# EAGLE board board layout (EAGLE 9.5.2)
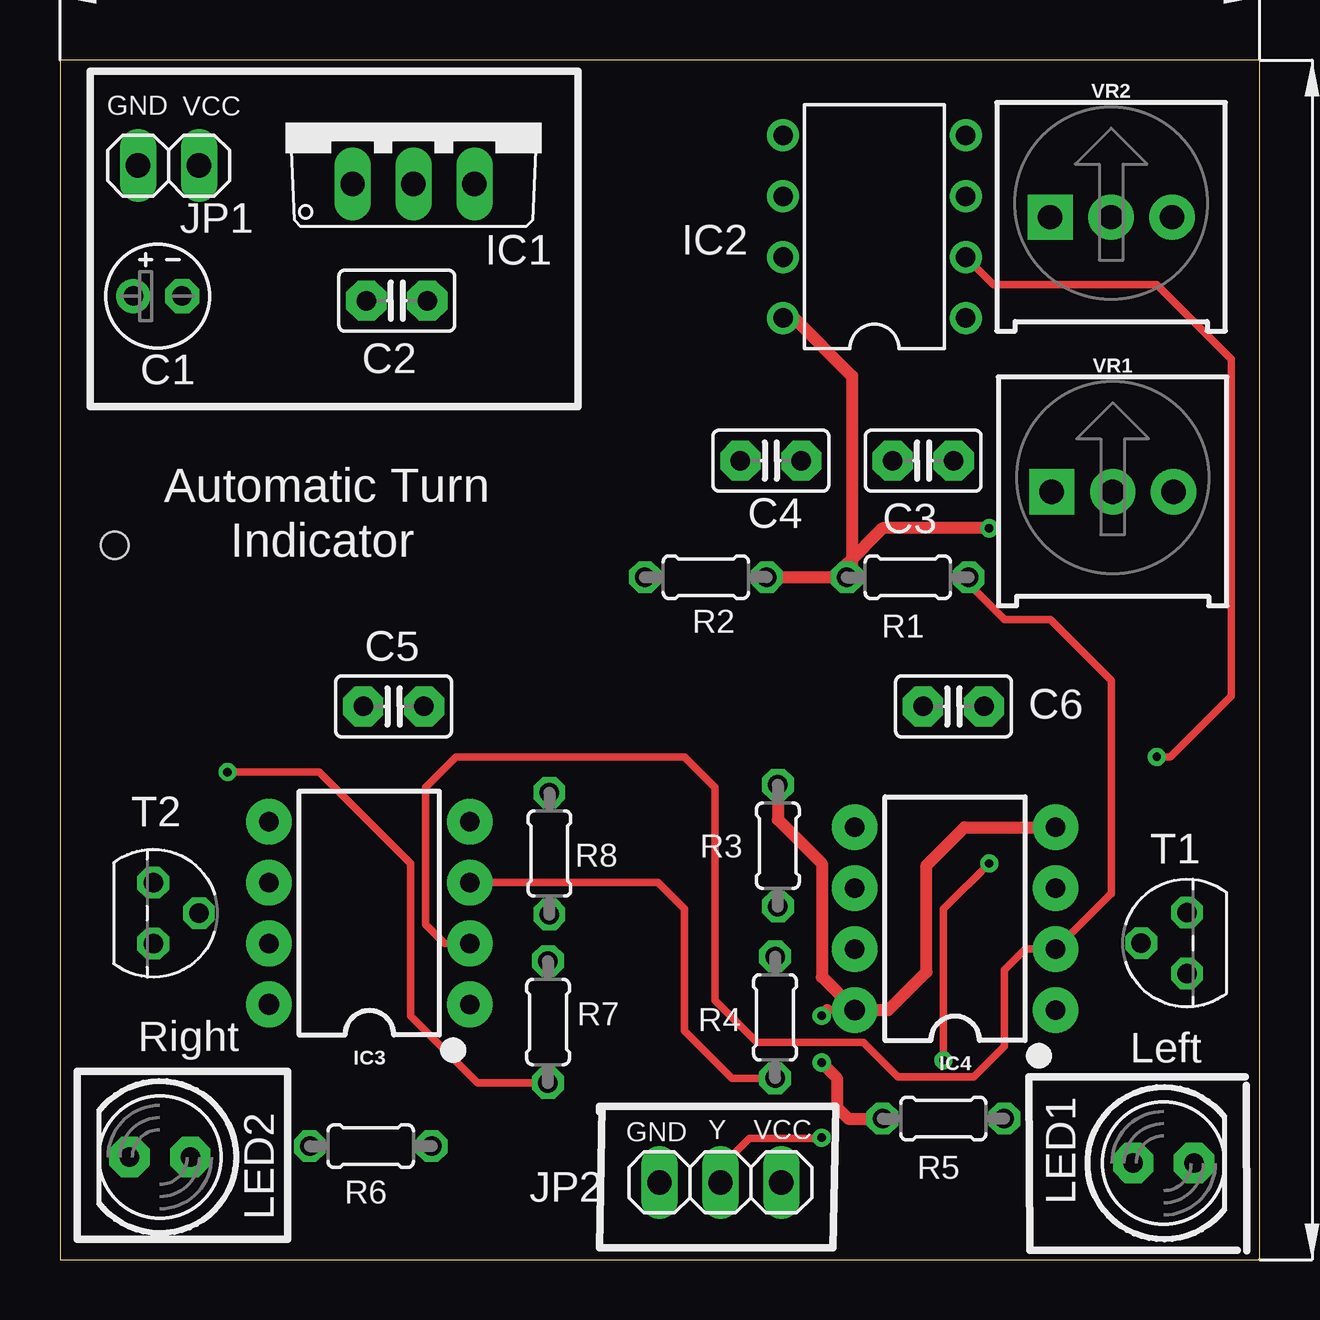
[diagram p0: board, top side]
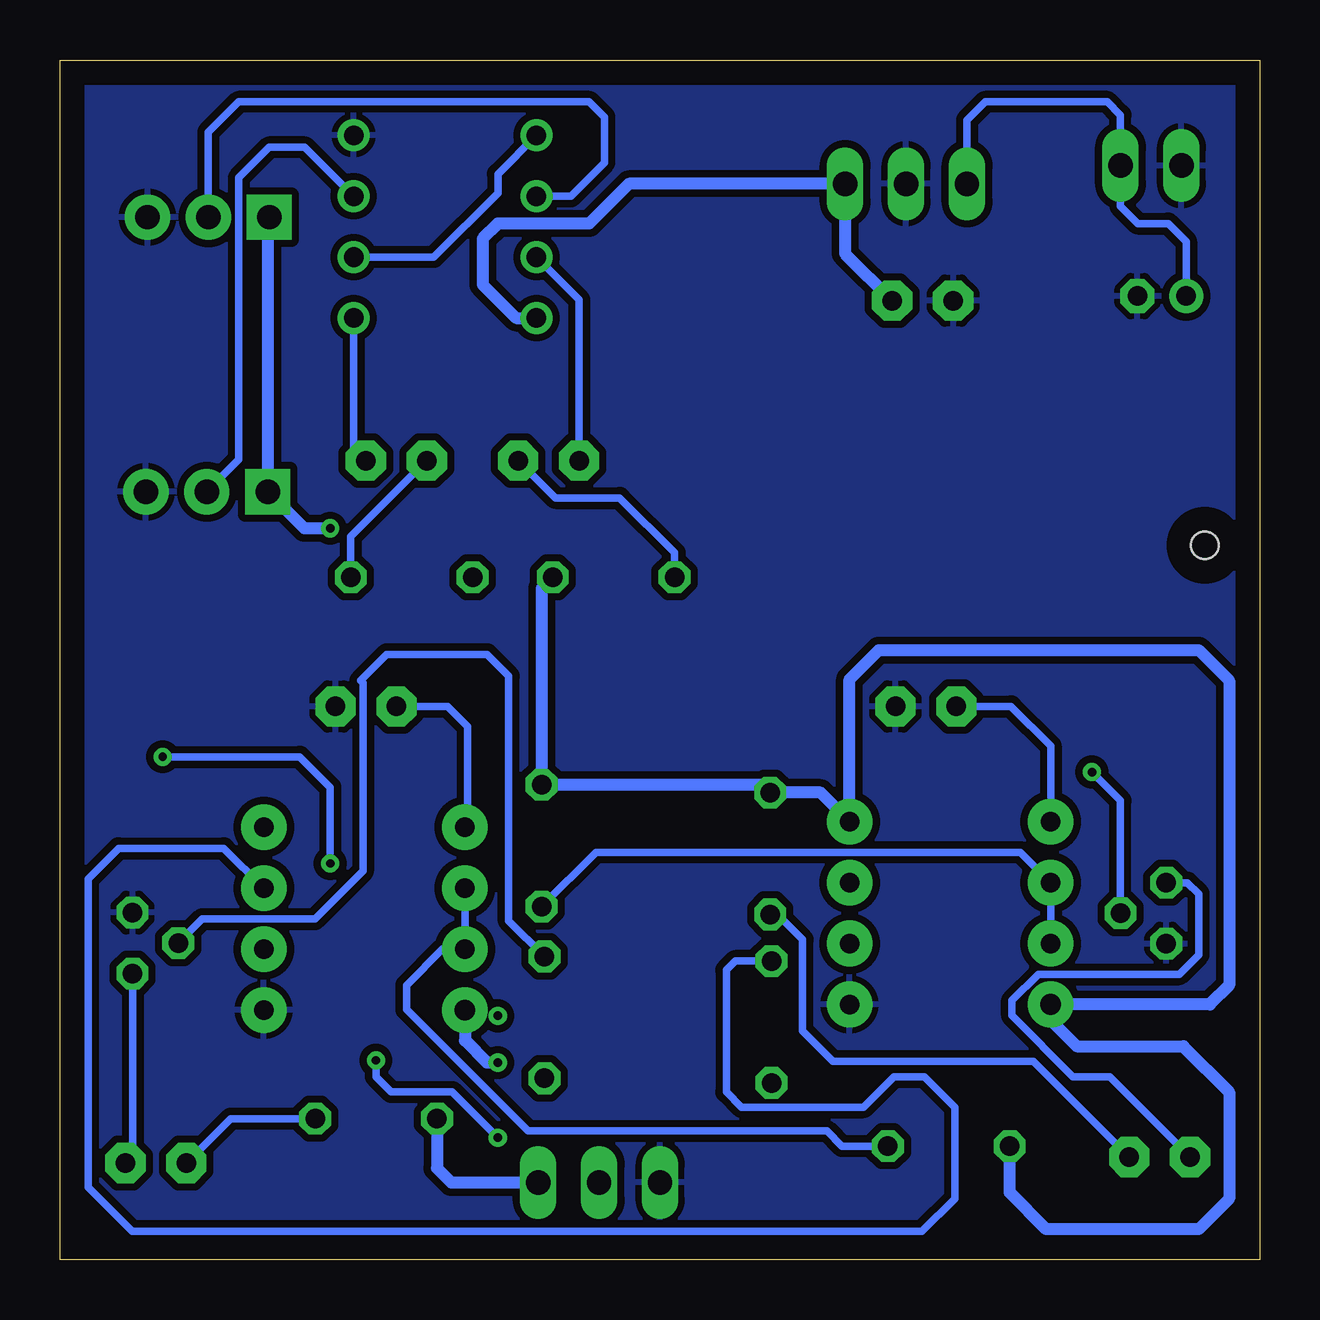
[diagram p1: board, bottom side, seen from below]

Size 50 x 50 mm. Coordinates in mm from the lower left corner, seen from the top.
Outline: 0,0 50,0 50,50 0,50 0,0
Copper layers (1*16): Top 0.035mm / dielectric 1.5mm / Bottom 0.035mm
Design rules "default *": minimum track width 6mil, minimum drill 0.35mm, track to track 12mil, track to pad 6mil, pad to pad 6mil, via to via 6mil, smd to smd 6mil, copper to edge 40mil, drill to drill 6mil, minimum pad ring 10mil, minimum via ring 8mil, stop-mask expansion 4mil, vias tented up to drill 0mil, thermal gap 10mil
Holes 1.14 mm at 2.28,29.77

## Footprints (pad centres in the part's own frame; a part is rotated, then mirrored left to right if it is on the bottom)
E2-4 = drill 0.813 pad 1.422: + -1.016,0 | drill 0.813 pad 1.422 octagon: - 1.016,0
C025-025X050 = drill 0.813 pad 1.676 octagon: 1 -1.27,0; 2 1.27,0
TO220V = drill 1.016 long: 1 -2.54,-2.54; 2 0,-2.54; 3 2.54,-2.54
DIL08 = drill 0.813 pad 1.27: 1 -3.81,-3.81; 2 -1.27,-3.81; 3 1.27,-3.81; 4 3.81,-3.81; 5 3.81,3.81; 6 1.27,3.81; 7 -1.27,3.81; 8 -3.81,3.81
DIP08-KIT = drill 0.813 pad 1.905: 1 -3.81,-4.191; 2 -1.27,-4.191; 3 1.27,-4.191; 4 3.81,-4.191; 5 3.81,4.191; 6 1.27,4.191; 7 -1.27,4.191 | drill 0.864 pad 1.905: 8 -3.81,4.191
1X02 = drill 1.016 long: 1 -1.27,0; 2 1.27,0
1X03 = drill 1.016 long: 1 -2.54,0; 2 0,0; 3 2.54,0
LED5MM = drill 0.813 pad 1.676 octagon: A -1.27,0; K 1.27,0
0204/5 = drill 0.813 octagon: 1 -2.54,0; 2 2.54,0
TO92 = drill 0.813 octagon: 1 1.27,0; 2 0,1.905; 3 -1.27,0
TRIMPOT-PTH-3386U = drill 1.016 pad 1.88 square: 1 -2.54,-0.015 | drill 1.016 pad 1.88: 2 0,-0.015; 3 2.54,-0.015

## Placement (x,y rotation side)
C1  470u  [E2-4]  4.07,40.16 0 top
C2  0.1u  [C025-025X050]  14.04,39.97 180 top
C3  1nf  [C025-025X050]  35.98,33.3 180 top
C4  1nf  [C025-025X050]  29.63,33.3 0 top
C5  0.1uf  [C025-025X050]  13.91,23.05 0 top
C6  0.1uf  [C025-025X050]  37.24,23.05 0 top
IC1  788TV  [TO220V]  14.74,47.38 0 top
IC2  LM393N  [DIL08]  33.95,43.05 90 top
IC3  555  [DIP08-KIT]  12.9,14.44 90 top
IC4  555  [DIP08-KIT]  37.31,14.21 90 top
JP1  [1X02]  4.53,45.6 0 top
JP2  [1X03]  27.53,3.22 0 top
LED1  green  [LED5MM]  46,4.02 0 top
LED2  green  [LED5MM]  4.16,4.27 180 top
R1  10k  [0204/5]  35.34,28.44 180 top
R2  10k  [0204/5]  26.92,28.44 0 top
R3  10k  [0204/5]  29.92,17.25 90 top
R4  10k  [0204/5]  29.8,10.09 90 top
R5  220  [0204/5]  36.82,5.87 180 top
R6  10k  [0204/5]  12.95,4.72 180 top
R7  10k  [0204/5]  20.34,9.9 270 top
R8  220  [0204/5]  20.4,16.92 90 top
T1  BC547  [TO92]  46.98,13.19 90 top
T2  BC547  [TO92]  3.89,14.44 270 top
VR1  10k  [TRIMPOT-PTH-3386U]  43.88,32.02 0 top
VR2  10k  [TRIMPOT-PTH-3386U]  43.81,43.46 0 top

## Library data of the parts
C1-C6 LED1 LED2 = adafruit
IC1 IC2 = linear
IC3 IC4 = SparkFun-IC-Special-Function; PROD_ID: IC-09173; PROD_ID_ALT: IC-11930
JP1 JP2 = pinhead
R1-R8 = rcl; SPICEPREFIX: R
T1 T2 = transistor
VR1 VR2 = SparkFun-Resistors; PROD_ID: RES-09730; SF_SKU: COM-09806

## Nets
GND: C1.- C2.2 C5.2 C6.2 IC1.2 IC2.4 IC3.1 IC4.1 JP1.1 JP2.1 T1.1 T2.1 VR1.3 VR2.3
N$1: C1.+ IC1.1 JP1.2
N$2: IC2.3 VR1.2
N$3: IC2.6 VR2.2
N$4: C3.1 IC2.1
N$5: C4.1 IC2.7
N$6: C5.1 IC3.5
N$7: IC3.6 IC3.7 R3.1
N$8: IC3.3 R4.1
N$9: R4.2 T1.2
N$10: LED1.K T1.3
N$11: LED1.A R5.1
N$12: C6.1 IC4.5
N$13: IC4.6 IC4.7 R6.1
N$14: IC4.3 R7.1
N$15: R7.2 T2.2
N$16: LED2.K T2.3
N$17: LED2.A R8.1
OUT_LEFT: C3.2 IC3.2 IC4.2 R1.1
OUT_RIGHT: C4.2 R2.1
VCC: C2.1 IC1.3 IC2.8 IC3.4 IC3.8 IC4.4 IC4.8 JP2.3 R1.2 R2.2 R3.2 R5.2 R6.2 R8.2 VR1.1 VR2.1
Y: IC2.2 IC2.5 JP2.2

## Tracks (layer width: path | path; a pad name or v marks a point on that pad's centre or on a via)
GND
  pour Bottom: 0,49.53 0,0 49.53,0 50.8,0 49.53,1.27 49.53,49.53
N$1
  Bottom 0.305: IC1.1 12.2,47.49 11.43,48.26 6.35,48.26 5.8,47.71 JP1.2 5.8,43.9 5.08,43.18 3.81,43.18 3.06,42.43 C1.+
N$2
  Bottom 0.305: IC2.3 39.79,46.35 41.27,46.35 42.55,45.09 42.55,33.33 VR1.2
N$3
  Bottom 0.305: IC2.6 28.7,44.32 27.3,45.72 27.3,47.62 27.94,48.26 42.55,48.26 43.81,46.99 VR2.2
N$4
  Bottom 0.305: IC2.1 37.76,33.8 C3.1
N$5
  Bottom 0.305: IC2.7 28.36,40 C4.1
N$6
  Bottom 0.305: C5.1 10.36,23.05 8.71,21.41 IC3.5
N$7
  Bottom 0.305: R3.1 27.66,16.97 9.96,16.97 IC3.6 IC3.7
N$8
  Top 0.305: IC3.3 24.93,15.71 26.04,14.61 26.04,9.53 28.01,7.55 R4.1
N$9
  Bottom 0.305: R4.2 31.29,14.12 31.29,24.32 32.2,25.22 36.38,25.22 37.48,24.13 37.37,24.02 37.37,16.2 39.37,14.2 44.07,14.2 T1.2
N$10
  Bottom 0.305: T1.3 46.98,4.32 LED1.K
N$11
  Bottom 0.305: R5.1 42.88,5.87 LED1.A
N$12
  Bottom 0.305: C6.1 33.85,23.05 33.02,22.23 33.02,18.12 IC4.5
N$13
  Bottom 0.305: R6.1 17.4,4.72 18.03,5.36 30.5,5.36 35.56,10.42 35.56,11.43 34.05,12.94 IC4.7 IC4.6
N$14
  Bottom 0.305: R7.1 21.85,12.44 22.23,12.06 22.23,6.99 21.59,6.35 16.51,6.35 15.24,7.62 13.97,7.62 12.7,6.35 12.7,2.54 14.07,1.17 46.99,1.17 48.83,3.01 48.83,15.88 47.56,17.14 43.17,17.14 IC4.3
N$15  (via drill 0.35)
  Top 0.305: v6.99,20.32 10.79,20.32 14.61,16.51 14.61,10.16 17.4,7.36 R7.2
  Bottom 0.305: T2.2 5.79,19.13 v6.99,20.32
N$16
  Bottom 0.305: LED2.K 6.24,7.62 7.78,7.62 10.32,10.17 10.32,10.79 9.23,11.89 3.35,11.89 2.54,12.7 2.54,15.24 3.01,15.71 T2.3
N$17
  Bottom 0.305: LED2.A 9.42,8.26 17.78,8.26 19.05,9.53 19.05,13.34 20.1,14.38 R8.1
OUT_LEFT
  Top 0.305: IC3.2 16.04,13.17 15.24,13.97 15.24,19.68 16.51,20.95 26.04,20.95 27.3,19.68 27.3,10.79 29.05,9.05 33.49,9.05 34.92,7.62 38.1,7.62 39.37,8.89 39.37,12.06 40.24,12.94 IC4.2 43.8,15.24 43.81,15.24 43.81,24.13 41.27,26.67 39.37,26.67 37.88,28.16 R1.1
  Bottom 0.305: C3.2 37.88,30.13 R1.1
OUT_RIGHT
  Bottom 0.305: C4.2 29.35,31.75 26.67,31.75 24.38,29.46 R2.1
VCC  (via drill 0.35)
  Top 0.305: 31.99,10.4 IC4.8
  Top 0.508: v38.73,30.48 34.29,30.48 32.8,28.99 R1.2 | R2.2 R1.2 | R3.2 29.92,18.34 31.75,16.51 31.75,11.77 IC4.8 34.53,10.4 36.12,11.99 36.12,16.43 37.7,18.02 IC4.4 | v31.75,10.16 31.99,10.4 | IC2.8 30.61,39.24 33.02,36.83 33.02,28.66 R1.2 | v31.75,8.21 32.38,7.57 32.38,6.35 32.86,5.87 R5.2
  Bottom 0.508: C2.1 17.28,41.94 IC1.3 26.28,44.84 27.94,43.18 31.75,43.18 32.38,42.55 32.38,40.64 30.99,39.24 IC2.8 | VR2.1 41.34,43.38 VR1.1 39.82,30.48 v38.73,30.48 | R6.2 10.41,2.79 8.89,1.27 2.54,1.27 1.27,2.54 1.27,6.99 3.17,8.89 7.62,8.89 9.04,10.3 IC3.8 2.07,10.63 1.27,11.43 1.27,24.13 2.54,25.4 15.88,25.4 17.09,24.19 IC3.4 18.3,19.46 R8.2 20.73,19.79 R3.2 29.92,27.98 R2.2 | R5.2 34.29,3.81 33.7,3.22 JP2.3 | IC4.8 33.12,9.13 32.2,8.21 v31.75,8.21
Y  (via drill 0.35)
  Top 0.305: IC2.2 38.9,40.64 45.72,40.64 48.83,37.53 48.83,23.5 46.29,20.95 v45.72,20.95 | v38.73,16.51 36.83,14.61 v36.83,8.3 | v31.75,5.08 31.72,5.05 28.73,5.05 27.53,3.85 JP2.2
  Bottom 0.305: IC2.5 31.75,45.25 31.75,44.45 34.42,41.78 IC2.2 | v38.73,16.51 38.73,19.68 40.01,20.95 v45.72,20.95 | v36.83,8.3 36.83,7.62 36.2,6.99 33.66,6.99 v31.75,5.08

## Text on the board
tNames: GND | VCC | Automatic Turn | Indicator | Right | Left | GND | Y | VCC